# EAGLE board RoverMuxJig (EAGLE 7.1.0)
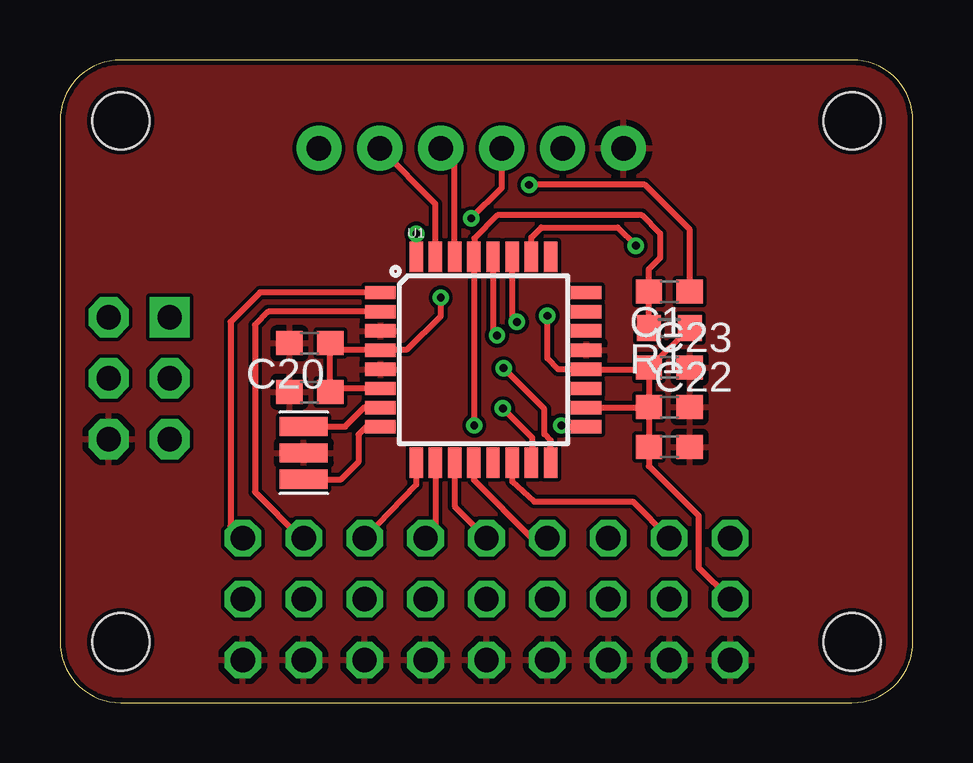
[diagram p0: board, top side]
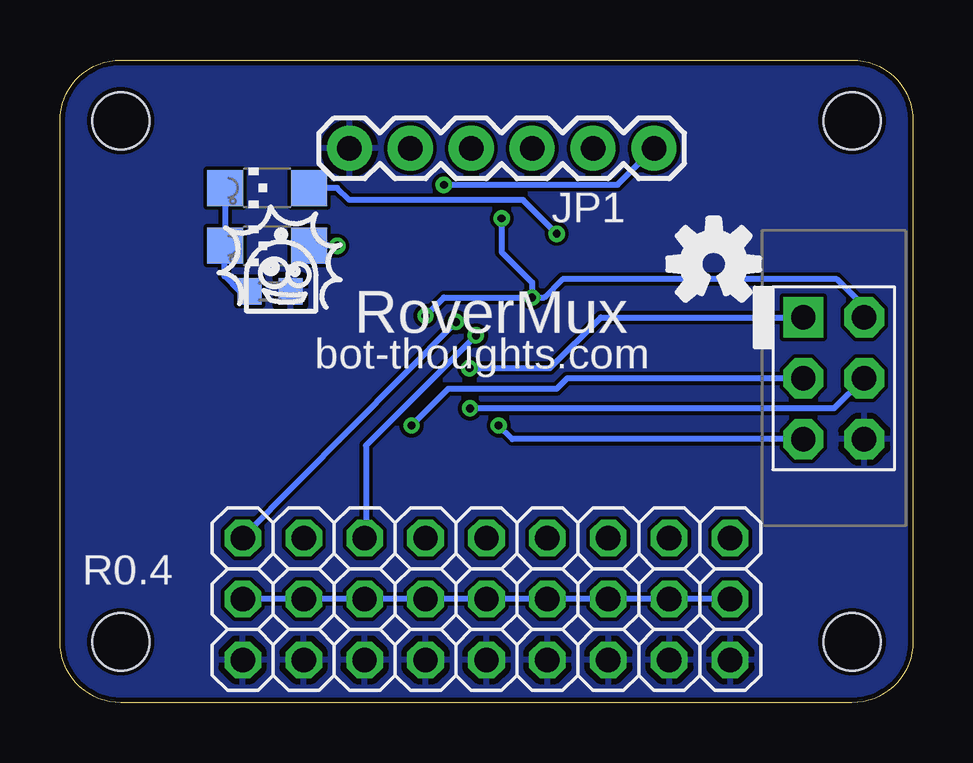
[diagram p1: board, bottom side, seen from below]

Size 35.56 x 26.8 mm. Coordinates in mm from the lower left corner, seen from the top.
Outline: 33.02,26.8 2.54,26.8 arc90 0,24.26 0,2.54 arc90 2.54,0 33.02,0 arc90 35.56,2.54 35.56,24.26 arc90 33.02,26.8
Copper layers (1*16): Top 0.0356mm / dielectric 1.5011mm / Bottom 0.0356mm
Design rules "LaenPCBOrder *": minimum track width 6mil, minimum drill 13mil, track to track 6mil, track to pad 6mil, pad to pad 6mil, via to via 6mil, smd to smd 6mil, copper to edge 8mil, drill to drill 6mil, minimum pad ring 7mil, minimum via ring 7mil, stop-mask expansion 4mil, vias tented up to drill 20mil, thermal gap 10mil
Holes 2.39 mm at 33.02,2.54 33.02,24.26 2.54,2.54 2.54,24.26

## Footprints (pad centres in the part's own frame; a part is rotated, then mirrored left to right if it is on the bottom)
C0603 = smd 1.1 x 1: 1 -0.85,0; 2 0.85,0
CON6P2R = drill 1.016 pad 1.676 square: 1 -2.54,-1.27 | drill 1.016 pad 1.676 octagon: 2 -2.54,1.27; 3 0,-1.27; 4 0,1.27; 5 2.54,-1.27; 6 2.54,1.27
FTDI_BASIC = drill 1.016 pad 1.88: CTS 10.16,0; DTR 0,0; GND 12.7,0; RXI 2.54,0; TXO 5.08,0; VCC 7.62,0
1X03-S = drill 1.016 octagon: 1 -2.54,0; 2 0,0; 3 2.54,0
CHIPLED_1206 = smd 1.5 x 1.5: A 0,-1.75; C 0,1.75
CSTCE_V_C = smd 0.8 x 2: GND 0,0; X1 -1.1,0; X2 1.1,0
R0603 = smd 1 x 1.1: 1 -0.85,0; 2 0.85,0
TQFP32-08 = smd 1.27 x 0.559: 1 -4.293,2.8; 2 -4.293,2; 3 -4.293,1.2; 4 -4.293,0.4; 5 -4.293,-0.4; 6 -4.293,-1.2; 7 -4.293,-2; 8 -4.293,-2.8; 17 4.293,-2.8; 18 4.293,-2; 19 4.293,-1.2; 20 4.293,-0.4; 21 4.293,0.4; 22 4.293,1.2; 23 4.293,2; 24 4.293,2.8 | smd 0.559 x 1.27: 9 -2.8,-4.293; 10 -2,-4.293; 11 -1.2,-4.293; 12 -0.4,-4.293; 13 0.4,-4.293; 14 1.2,-4.293; 15 2,-4.293; 16 2.8,-4.293; 25 2.8,4.293; 26 2,4.293; 27 1.2,4.293; 28 0.4,4.293; 29 -0.4,4.293; 30 -1.2,4.293; 31 -2,4.293; 32 -2.8,4.293

## Placement (x,y rotation side)
C1  104  [C0603]  25.4,17.14 180 top
C10  106  [C0603]  25.4,10.67 0 top
C20  104  [C0603]  10.41,14.99 180 top
C21  104  [C0603]  10.41,12.95 180 top
C22  104  [C0603]  25.4,12.32 0 top
C23  106  [C0603]  25.4,13.97 0 top
J1  ISP  [CON6P2R]  3.3,13.53 270 bottom
JP1  FTDI  [FTDI_BASIC]  10.79,23.11 180 bottom
JP11  1MCU  [1X03-S]  7.62,4.32 270 bottom
JP12  2MCU  [1X03-S]  15.24,4.32 270 bottom
JP13  3MCU  [1X03-S]  22.86,4.32 270 bottom
JP21  1R/C  [1X03-S]  10.16,4.32 270 bottom
JP22  2R/C  [1X03-S]  17.78,4.32 270 bottom
JP23  3R/C  [1X03-S]  25.4,4.32 270 bottom
JP31  1OUT  [1X03-S]  12.7,4.32 270 bottom
JP32  2OUT  [1X03-S]  20.32,4.32 270 bottom
JP33  3OUT  [1X03-S]  27.94,4.32 270 bottom
LED1  PASS  [CHIPLED_1206]  26.92,19.05 90 bottom
LED2  FAIL  [CHIPLED_1206]  26.92,21.46 90 bottom
Q1  16MHz  [CSTCE_V_C]  10.16,10.41 270 top
R1  10K  [R0603]  25.4,15.62 180 top
R2  1K  [R0603]  26.8,17.14 0 bottom
U1  ATMEGA328P_TQFP  [TQFP32-08]  17.65,14.3 0 top

## Library data of the parts
C1 C20-C22 = rcl; PARTNO: C1608X7R1E104K080AA
C10 C23 = rcl; PARTNO: CL10A106MP8NNNC; VOLTAGE: 10V
J1 = bt_avr
JP1 = SparkFun-Connectors
JP11-JP13 JP21-JP23 JP31-JP33 = pinhead-2
LED1 = led; PARTNO: LH N974-KN-1
LED2 = led; PARTNO: LG N971-KN-1
Q1 = bt_crystal
R1 R2 = rcl; PARTNO: RC0603JR-07330RL
U1 = SparkFun-DigitalIC; PROD_ID: IC-09069

## Nets
5V: C10.1 C20.1 C21.1 C22.1 C23.1 J1.2 JP1.VCC JP11.2 JP12.2 JP13.2 JP21.2 JP22.2 JP23.2 JP31.2 JP32.2 JP33.2 R1.1 U1.4 U1.6 U1.18 U1.20
!RESET: C1.2 J1.5 R1.2 U1.29
CH1MCU: JP11.1 U1.1
CH1OUT: JP31.1 U1.9
CH1RX: JP21.1 U1.2
CH2MCU: JP12.1 U1.10
CH2OUT: JP32.1 U1.12
CH2RX: JP22.1 U1.11
CH3MCU: JP13.1 U1.28
CH3OUT: JP33.1 U1.27
CH3RX: JP23.1 U1.14
FAIL: LED2.A U1.32
GND: C10.2 C20.2 C21.2 C22.2 C23.2 J1.6 JP1.GND JP11.3 JP12.3 JP13.3 JP21.3 JP22.3 JP23.3 JP31.3 JP32.3 JP33.3 Q1.GND R2.2 U1.3 U1.5 U1.21
MISO: J1.1 U1.16
MOSI: J1.4 U1.15
N$1: Q1.X2 U1.8
N$2: Q1.X1 U1.7
N$3: LED1.C LED2.C R2.1
N$4: C1.1 JP1.DTR
PASS: LED1.A U1.26
RX<: JP1.TXO U1.30
SCK: J1.3 U1.17
TX>: JP1.RXI U1.31

## Tracks (layer width: path | path; a pad name or v marks a point on that pad's centre or on a via)
5V  (via drill 0.33)
  Top 0.254: R1.1 C23.1 | C22.1 C10.1 24.55,9.87 26.62,7.8 26.62,5.64 JP33.2 | C23.1 C22.1 | C23.1 24.48,13.9 U1.20 20.77,13.9 20.32,14.35 v20.32,16.13 | U1.6 11.41,13.1 C21.1 C20.1 11.55,14.7 U1.4 13.39,14.73 14.48,14.73 15.88,16.13 v15.88,16.89 | U1.18 24.53,12.3 C22.1 | JP1.VCC 18.41,21.46 v17.14,20.19
  Bottom 0.254: JP11.2 JP21.2 JP31.2 JP12.2 JP22.2 JP32.2 JP13.2 JP23.2 JP33.2 | J1.2 2.03,16.51 3.17,17.65 14.61,17.65 15.37,16.89 v15.88,16.89 | v20.32,16.13 19.56,16.89 v15.88,16.89 | v17.14,20.19 17.14,18.8 15.88,17.53 v15.88,16.89
!RESET  (via drill 0.33)
  Top 0.254: v17.27,11.56 17.27,17.43 U1.29 17.27,18.61 17.27,19.36 18.24,20.32 24.26,20.32 25.02,19.56 25.02,18.54 24.55,18.07 C1.2 R1.2
  Bottom 0.254: J1.5 16.7,10.99 v17.27,11.56
CH1MCU
  Top 0.254: U1.1 8.34,17.1 7.11,15.88 7.11,7.37 JP11.1
CH1OUT
  Top 0.254: U1.9 14.85,9.09 JP31.1
CH1RX
  Top 0.254: U1.2 8.68,16.3 8.13,15.75 8.13,8.79 10.06,6.86 JP21.1
CH2MCU
  Top 0.254: U1.10 15.65,7.27 JP12.1
CH2OUT
  Top 0.254: U1.12 17.25,9.29 19.68,6.86 JP32.1
CH2RX
  Top 0.254: U1.11 16.45,8.19 JP22.1
CH3MCU  (via drill 0.33)
  Top 0.254: U1.28 18.05,15.47 v18.22,15.31
  Bottom 0.254: v18.22,15.31 22.81,10.72 22.81,6.91 JP13.1
CH3OUT  (via drill 0.33)
  Top 0.254: U1.27 18.85,16.07 v19.05,15.88
  Bottom 0.254: v19.05,15.88 27.89,6.96 JP33.1
CH3RX
  Top 0.254: U1.14 18.85,9.21 19.76,8.38 23.88,8.38 JP23.1
FAIL  (via drill 0.33)
  Top 0.254: U1.32 v14.85,19.55
  Bottom 0.254: v14.85,19.55 16.26,20.95 23.5,20.95 24,21.46 LED2.A
GND
  pour Top (rank 3): 2.54,26.8 33.12,26.8 arc-90 35.56,24.26 35.56,2.54 arc-90 33.02,0 2.54,0 arc-90 0,2.54 0,24.26 arc-90
  pour Bottom: 2.54,26.8 33.02,26.8 arc-90 35.56,24.26 35.56,2.54 arc-90 33.02,0 2.54,0 arc-90 0,2.54 0,24.26 arc-90
MISO  (via drill 0.33)
  Top 0.254: U1.16 20.45,10.94 20.19,11.2 20.19,12.24 v18.49,13.95
  Bottom 0.254: v18.49,13.95 15.14,13.95 13.02,16.07 J1.1
MOSI  (via drill 0.33)
  Top 0.254: v18.47,12.27 19.68,11.05 19.68,10.04 U1.15
  Bottom 0.254: J1.4 3.29,12.27 v18.47,12.27
N$1
  Top 0.254: U1.8 12.77,11.5 12.45,11.18 12.45,10.03 11.73,9.31 Q1.X2
N$2
  Top 0.254: Q1.X1 11.89,11.51 12.7,12.32 13.34,12.32 U1.7
N$3
  Bottom 0.254: LED2.C LED1.C 28.7,19.02 28.7,17.78 28.07,17.14 R2.1
N$4  (via drill 0.33)
  Top 0.254: C1.1 26.25,19.72 24.38,21.59 v19.56,21.59
  Bottom 0.254: v19.56,21.59 12.32,21.59 JP1.DTR
PASS  (via drill 0.33)
  Top 0.254: U1.26 19.65,19.4 20.07,19.81 23.24,19.81 v24,19.05
  Bottom 0.254: v24,19.05 LED1.A
RX<
  Top 0.254: U1.30 16.45,22.54 JP1.TXO
SCK  (via drill 0.33)
  Top 0.254: v20.9,11.56 21.27,11.5 U1.17
  Bottom 0.254: J1.3 14.41,13.53 14.86,13.08 19.38,13.08 v20.9,11.56
TX>
  Top 0.254: U1.31 15.65,20.8 JP1.RXI

## Text on the board
bNames: RoverMux | bot-thoughts.com | R0.4
tsilk: U1 | U3 | 104 | 104 | 1K | U2 | 106 | 10K | 10K | 106 | 2mm/#2
bsilk: R/C | MCU | RoverMux | bot-thoughts.com | 1MCU | 1R/C | 1OUT | 2MCU | 2R/C | 2OUT | 3MCU | 3R/C | 3OUT | ISP | R0.4